# Altium PCB PCBtodojunto.PcbDoc (part 1 of 2)
Units mm, origin at the board's own origin, x right, y up, seen from the top; angles counter-clockwise.
Board outline 200 x 200 mm, 2 copper layers (Top Layer, Bottom Layer); 188 components, 125 nets, 535 pads, 86 vias.
Unrouted connection lines stored in the file: 1.
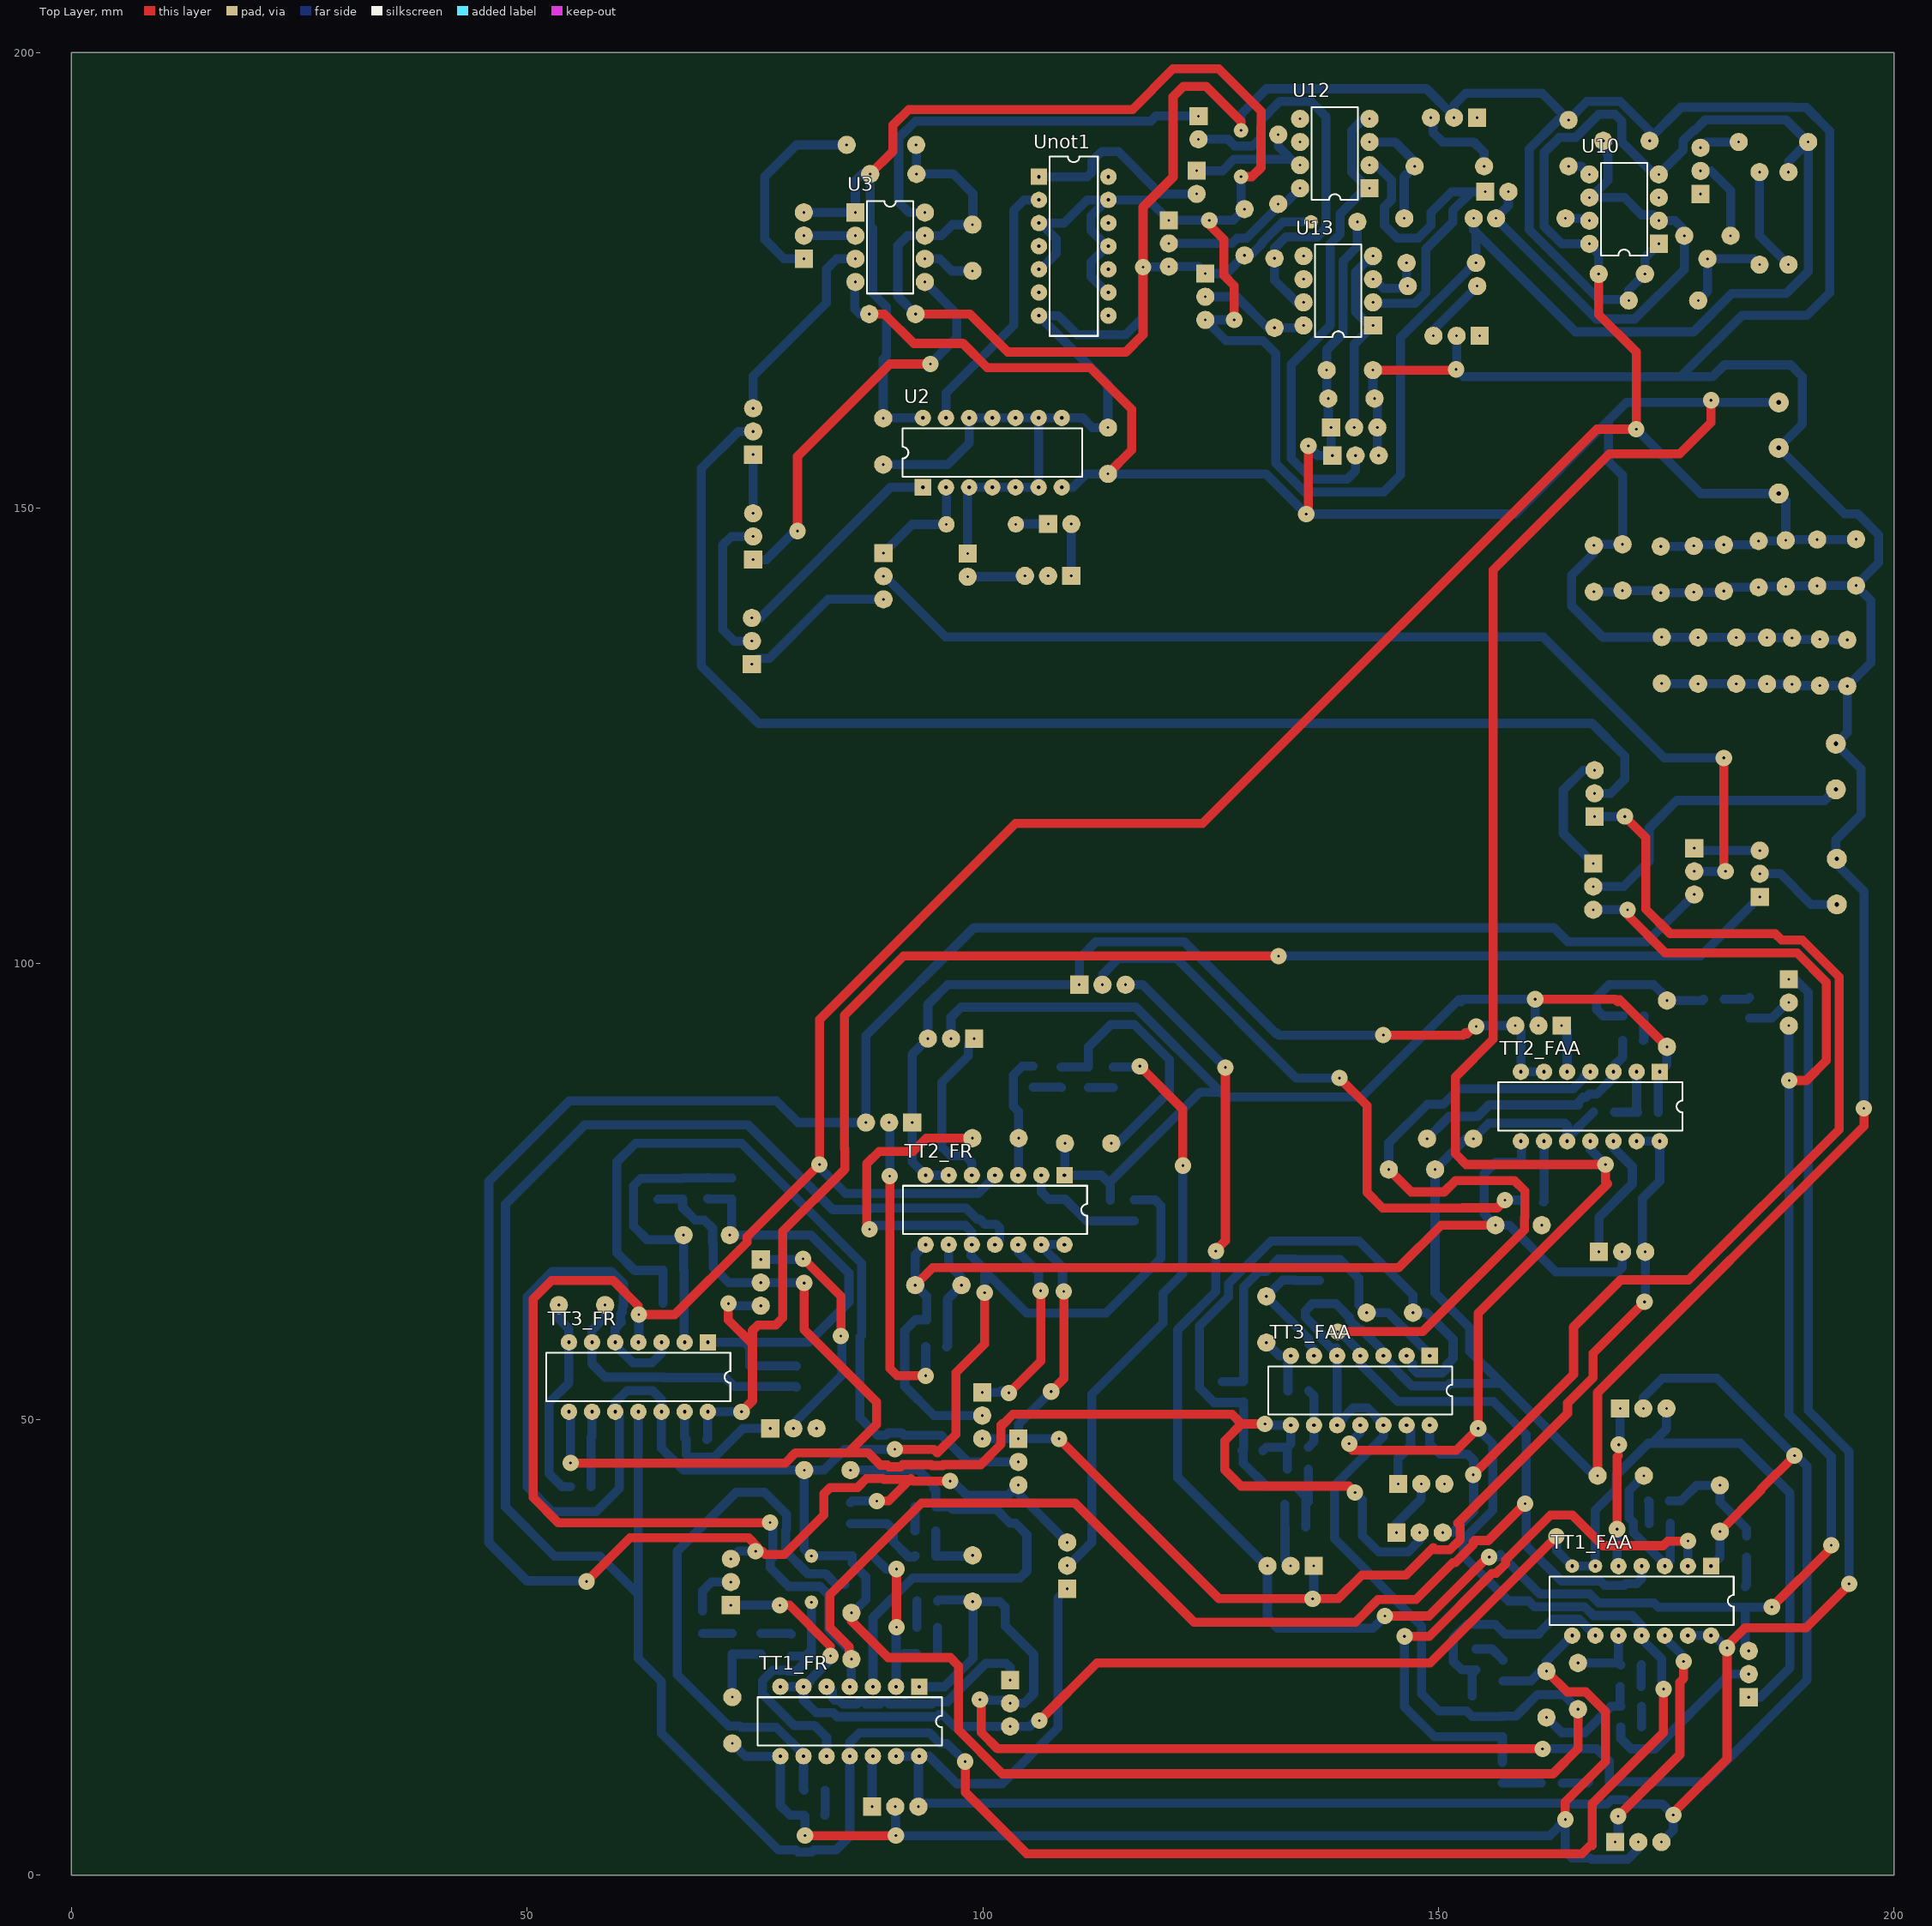
[diagram p0: Top Layer view]
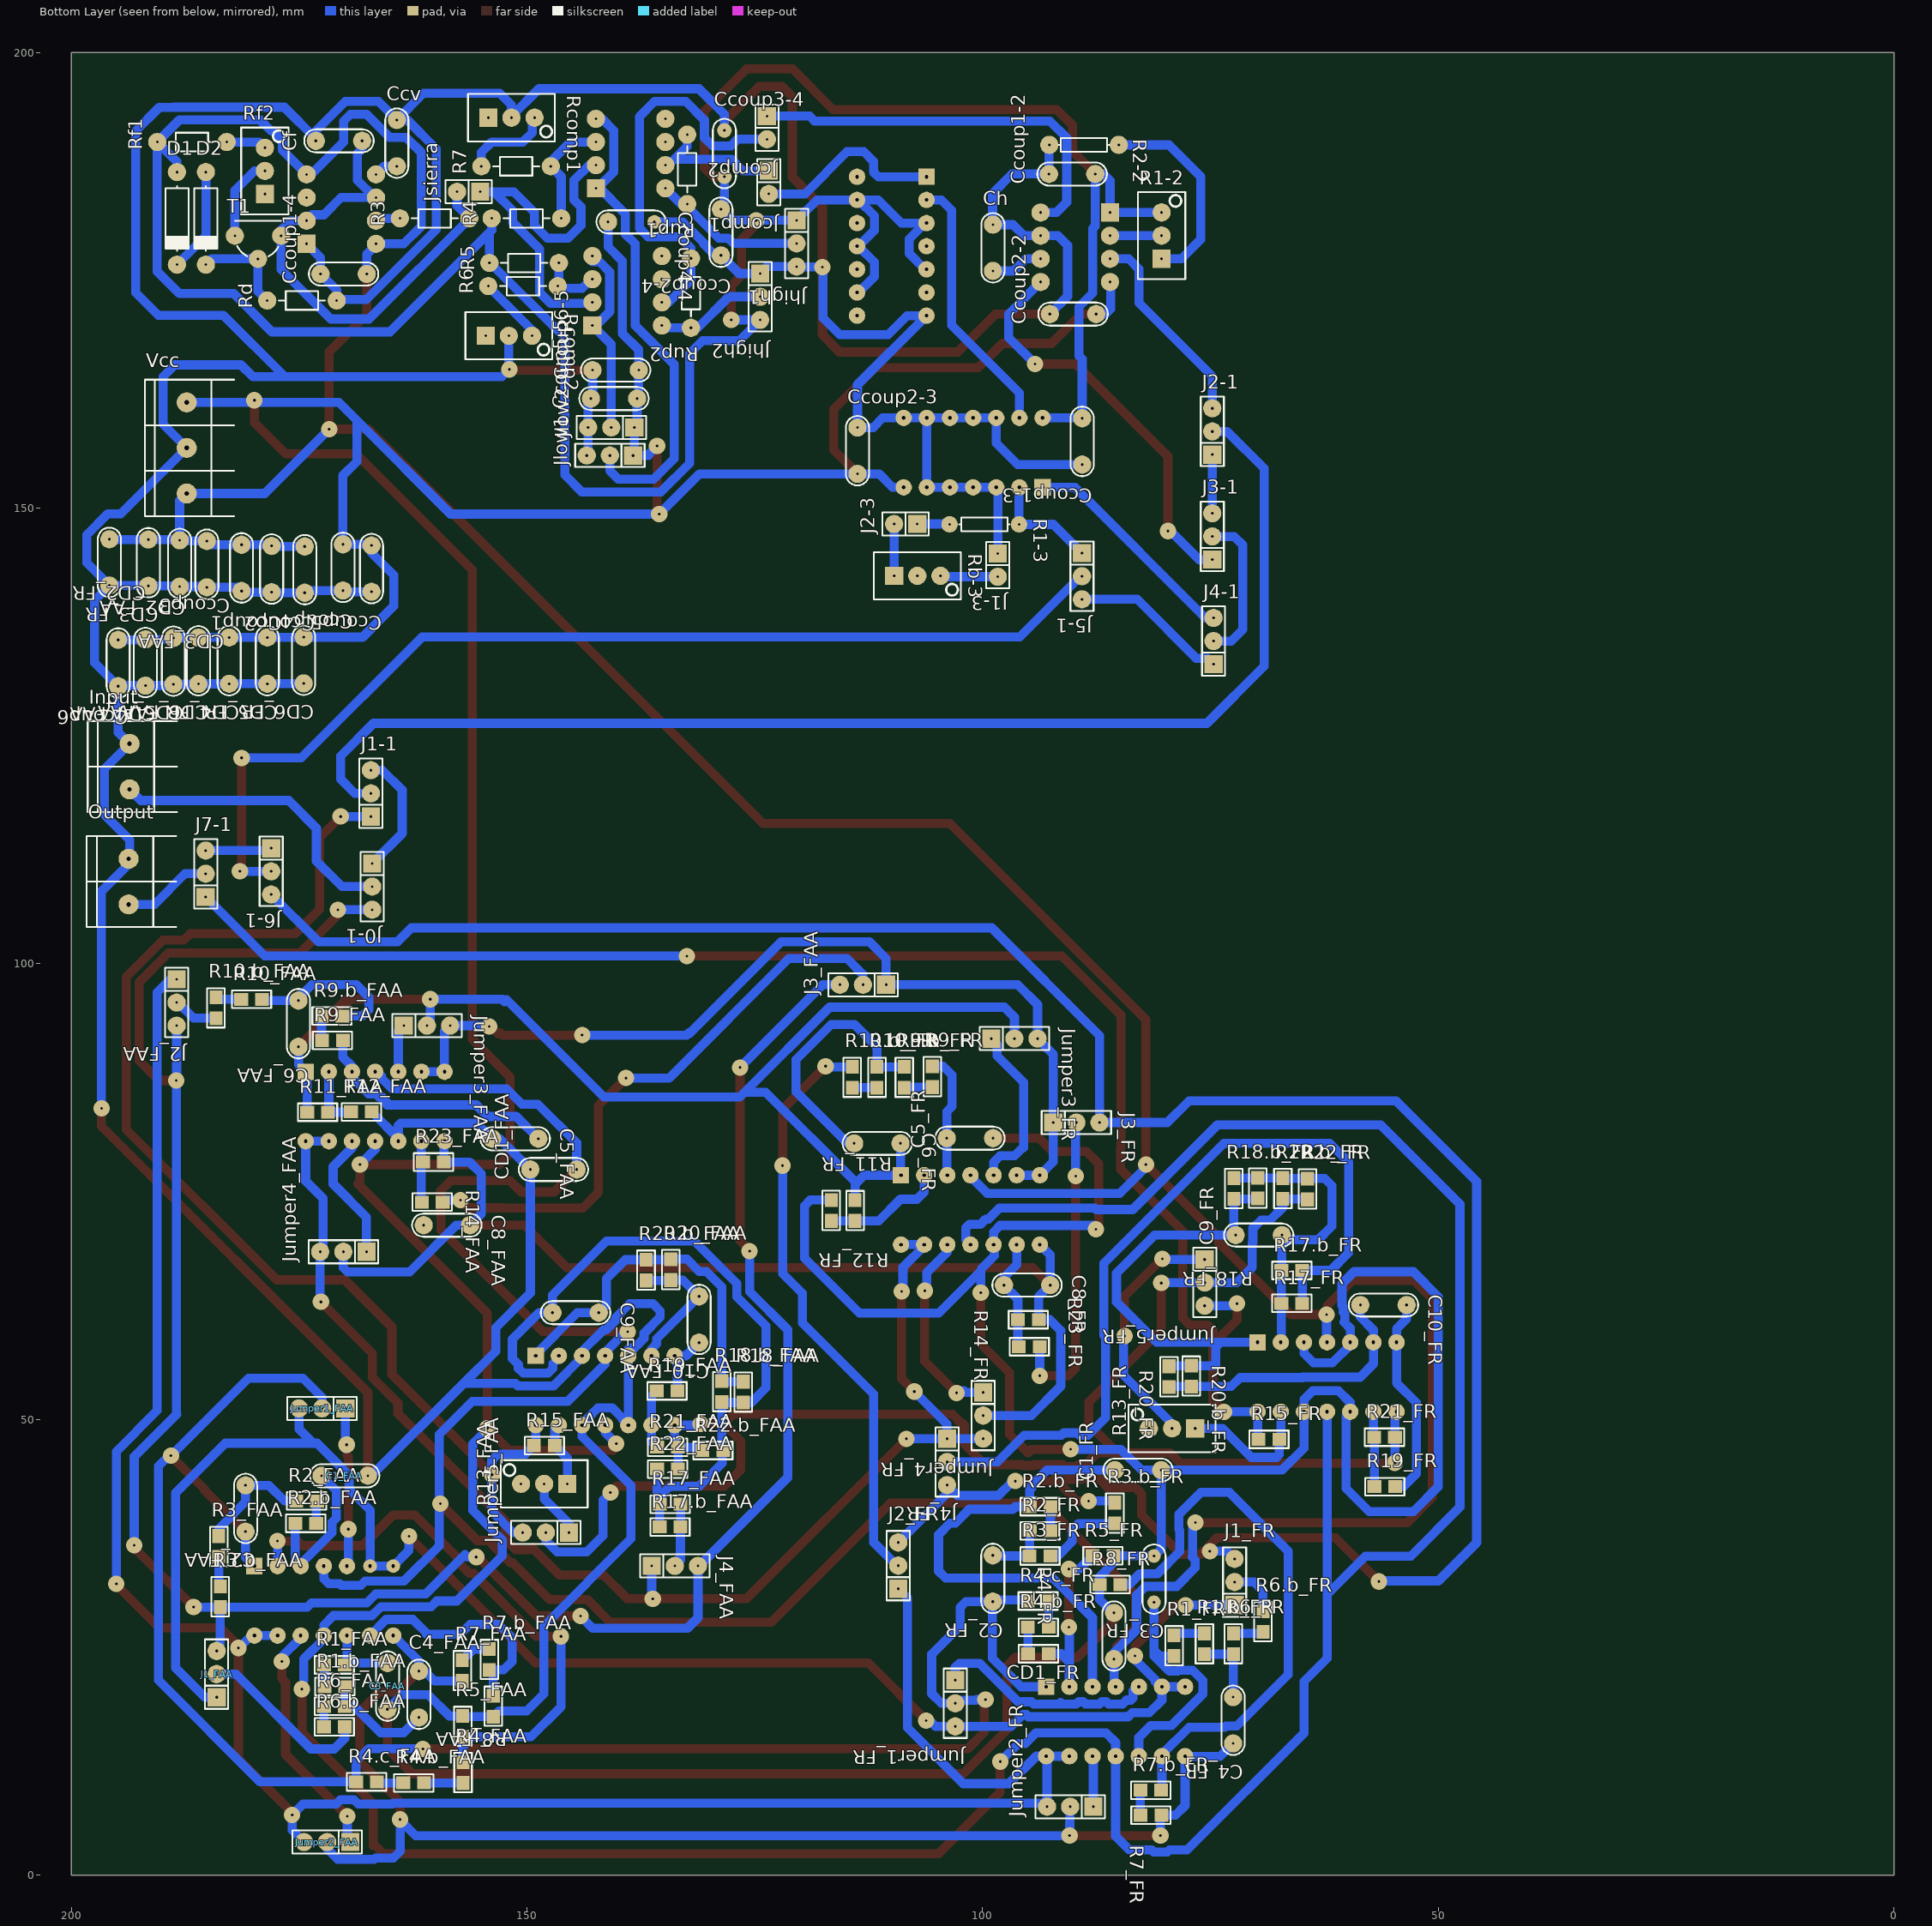
[diagram p1: Bottom Layer view, seen from below]
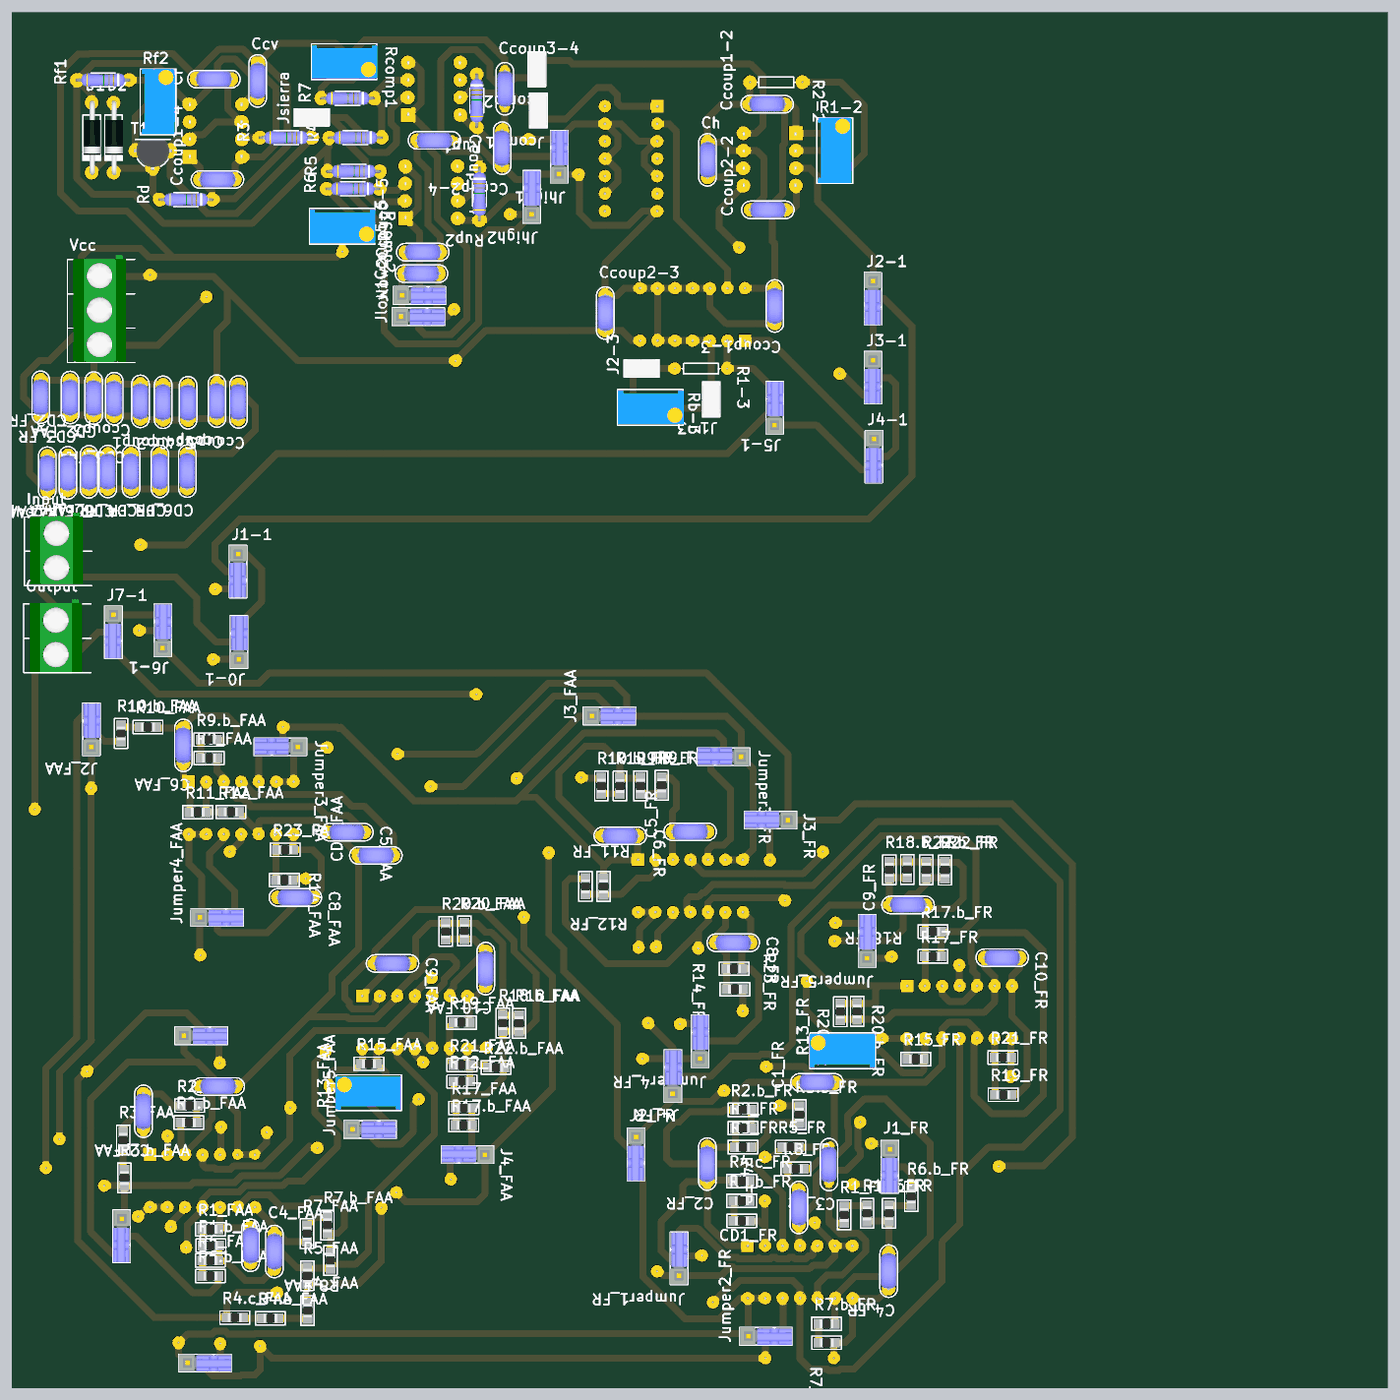
[diagram p3: 3D render of the assembled board from below, using the file's embedded part models]

## Layer stack, top to bottom
Top Solder: solder mask 0.0102, Solder Resist, Dk 3.5
Top Layer: signal copper 0.0356
Dielectric 1: dielectric 0.32, FR-4, Dk 4.8
Bottom Layer: signal copper 0.0356
Bottom Solder: solder mask 0.0102, Solder Resist, Dk 3.5

## Board outline
0,0 200,0 200,200 0,200

## Design rules (kind name [scope] priority, off if disabled: settings)
Clearance [All] p1: gap=0.4 ignorepadtopadclearanceinfootprint=FALSE
PolygonConnect [All] p1: connectstyle=Relief reliefconductorwidth=0.254 reliefentries=4 polygonreliefangle="90 Angle" airgapwidth=0.254
RoutingVias [All] p1: holewidth=0.4 width=2 viastyle="Through Hole" minholewidth=0.3 minwidth=1.9 maxholewidth=0.5 maxwidth=2.1
SolderMaskExpansion [All] p1: expansion=0.102
Width [All] p1: maxlimit=1.1 minlimit=0.9 preferedwidth=1
30 further rules are at their usual default settings.

## Classes and differential pairs
channel class Schematic: FAA FR
component class sampler: Ccoup1 Ccoup2 Ccoup3 Ccoup4 Ccoup5 Ccoup6 Input J0-1 J1-1 J2-1 J3-1 J4-1 J5-1 J6-1 J7-1 Output Unot1 Vcc
component class "SAMPLE AND HOLD": Ccoup1-2 Ccoup2-2 Ch R1-2 R2-2 U3
component class OSCILADOR: Ccoup1-4 Ccoup2-4 Ccoup3-4 Ccoup4-4 Ccoup5-5 Ccoup6-5 Ccv Cf D1 D2 Jcomp1 Jcomp2 Jhigh1 Jhigh2 Jlow1 Jlow2 Jsierra R3 R4 R5 R6 R7 Rcomp1 Rcomp2 Rd Rf1 Rf2 Rup1 Rup2 T1 U10 U12 U13
component class FR: C1_FR C2_FR C3_FR C4_FR C5_FR C6_FR C8_FR C9_FR C10_FR CD1_FR CD2_FR CD3_FR CD4_FR CD5_FR CD6_FR J1_FR J2_FR J3_FR J4_FR Jumper1_FR Jumper2_FR Jumper3_FR Jumper4_FR Jumper5_FR R1.b_FR R1_FR R2.b_FR R2_FR R3.b_FR R3_FR R4.b_FR R4.c_FR R4_FR R5_FR R6.b_FR R6_FR R7.b_FR R7_FR R8_FR R9.b_FR R9_FR R10.b_FR R10_FR R11_FR R12_FR R13_FR R14_FR R15_FR R17.b_FR R17_FR R18.b_FR R18_FR R19_FR R20.b_FR R20_FR R21_FR R22.b_FR R22_FR R23_FR TT1_FR TT2_FR TT3_FR
component class FAA: C1_FAA C2_FAA C3_FAA C4_FAA C5_FAA C6_FAA C8_FAA C9_FAA C10_FAA CD1_FAA CD2_FAA CD3_FAA CD4_FAA CD5_FAA CD6_FAA J1_FAA J2_FAA J3_FAA J4_FAA Jumper1_FAA Jumper2_FAA Jumper3_FAA Jumper4_FAA Jumper5_FAA R1.b_FAA R1_FAA R2.b_FAA R2_FAA R3.b_FAA R3_FAA R4.b_FAA R4.c_FAA R4_FAA R5_FAA R6.b_FAA R6_FAA R7.b_FAA R7_FAA R8_FAA R9.b_FAA R9_FAA R10.b_FAA R10_FAA R11_FAA R12_FAA R13_FAA R14_FAA R15_FAA R17.b_FAA R17_FAA R18.b_FAA R18_FAA R19_FAA R20.b_FAA R20_FAA R21_FAA R22.b_FAA R22_FAA R23_FAA TT1_FAA TT2_FAA TT3_FAA
component class "ANALOG SWITCH": Ccoup1-3 Ccoup2-3 J1-3 J2-3 R1-3 Rb-3 U2

## Components (designator, comment, footprint, x,y, rotation, side; value= is the part's Value field where it differs from the comment)
C1_FAA "1n" CAP200#1 170.01,43.837 r0 bottom (schematic designator C1)
C1_FR "1n" CAP200#1 82.954,44.447 r0 bottom (schematic designator C1)
C2_FAA "1n" CAP200#1 180.894,40.237 r270 bottom (schematic designator C2)
C2_FR "1n" CAP200#1 98.894,32.557 r270 bottom (schematic designator C2)
C3_FAA "1n" CAP200#1 165.32,20.747 r90 bottom (schematic designator C3)
C3_FR "1n" CAP200#2 81.204,32.487 r270 bottom (schematic designator C3)
C4_FAA "1n" CAP200#1 161.86,19.847 r90 bottom (schematic designator C4)
C4_FR "1n" CAP200#1 72.524,16.997 r270 bottom (schematic designator C4)
C5_FAA "1n" CAP200#1 151.3,80.817 r180 bottom (schematic designator C5)
C5_FR "1n" CAP200#1 101.404,80.874 r0 bottom (schematic designator C5)
C6_FAA "1n" CAP200#1 175.084,93.437 r270 bottom (schematic designator C6)
C6_FR "1n" CAP200#1 111.564,80.304 r180 bottom (schematic designator C6)
C8_FAA "7.9n" CAP200#1 158.804,71.327 r180 bottom (schematic designator C8)
C8_FR "7.9n" CAP200#1 95.134,64.744 r180 bottom (schematic designator C8)
C9_FAA "10n" CAP200#1 144.674,61.727 r180 bottom (schematic designator C9)
C9_FR "10n" CAP200#1 69.714,70.237 r0 bottom (schematic designator C9)
C10_FAA "10n" CAP200#1 131.124,60.977 r270 bottom (schematic designator C10)
C10_FR "10n" CAP200#1 56.024,62.567 r180 bottom (schematic designator C10)
Ccoup1 "CAP" CAP200#1 178.03,143.32 r270 bottom
Ccoup1-2 "CAP" CAP200#1 90.19,186.676 r0 bottom
Ccoup1-3 "CAP" CAP200#1 89.084,157.33 r270 bottom
Ccoup1-4 "CAP" CAP200#1 170.13,175.709 r0 bottom
Ccoup2 "CAP" CAP200#1 174.4,143.26 r270 bottom
Ccoup2-2 "CAP" CAP200#1 90.09,171.306 r0 bottom
Ccoup2-3 "CAP" CAP200#1 113.744,156.31 r90 bottom
Ccoup2-4 "CAP" CAP200#1 128.728,180.281 r270 bottom
Ccoup3 "CAP" CAP200#1 181.33,143.45 r270 bottom
Ccoup3-4 "CAP" CAP200#3 128.347,188.917 r90 bottom
Ccoup4 "CAP" CAP200#1 170.21,143.5 r270 bottom
Ccoup4-4 "CAP" CAP200#4 138.57,181.424 r180 bottom
Ccoup5 "CAP" CAP200#1 167.07,143.37 r270 bottom
Ccoup5-5 "CAP" CAP200#1 140.46,162.034 r0 bottom
Ccoup6 "CAP" CAP200#1 194.87,133.01 r270 bottom
Ccoup6-5 "CAP" CAP200#1 140.28,165.154 r0 bottom
Ccv "CAP" CAP200#1 164.288,190.06 r90 bottom
CD1_FAA "100n" CAP200#1 147.1,77.437 r0 bottom (schematic designator CD1)
CD1_FR "100n" CAP200#1 85.594,26.247 r90 bottom (schematic designator CD1)
CD2_FAA "100n" CAP200#1 188.12,143.94 r270 bottom (schematic designator CD2)
CD2_FR "100n" CAP200#1 195.83,144.054 r270 bottom (schematic designator CD2)
CD3_FAA "100n" CAP200#1 185.14,143.86 r270 bottom (schematic designator CD3)
CD3_FR "100n" CAP200#1 191.562,144.022 r270 bottom (schematic designator CD3)
CD4_FAA "100n" CAP200#1 191.87,133.07 r270 bottom (schematic designator CD4)
CD4_FR "100n" CAP200#1 182.69,133.274 r270 bottom (schematic designator CD4)
CD5_FAA "100n" CAP200#1 188.81,133.22 r270 bottom (schematic designator CD5)
CD5_FR "100n" CAP200#1 178.5,133.274 r270 bottom (schematic designator CD5)
CD6_FAA "100n" CAP200#1 186.064,133.26 r270 bottom (schematic designator CD6)
CD6_FR "100n" CAP200#1 174.51,133.314 r270 bottom (schematic designator CD6)
Cf "CAP" CAP200#1 170.638,190.314 r0 bottom
Ch "CAP" CAP200#1 98.88,178.576 r90 bottom
D1 "DIODO SCHOTTKY" DO41 188.418,181.805 r270 bottom
D2 "DIODO SCHOTTKY" DO41 185.243,181.805 r270 bottom
Input "BORNERA 2" BORNERA2 193.62,121.65 r180 bottom
J0-1 "JUMPER" JUMPER3 167,108.48 r270 bottom
J1-1 "JUMPER" JUMPER3 167.14,118.71 r90 bottom
J1-3 "JUMPER" JUMPER2 98.344,143.75 r270 bottom
J1_FAA "JUMPER" JUMPER3 184.06,22.067 r90 bottom (schematic designator J1)
J1_FR "JUMPER" JUMPER3 72.364,32.167 r90 bottom (schematic designator J1)
J2-1 "JUMPER" JUMPER3 74.81,158.42 r90 bottom
J2-3 "JUMPER" JUMPER2 108.454,148.27 r0 bottom
J2_FAA "JUMPER" JUMPER3 188.454,95.757 r270 bottom (schematic designator J2)
J2_FR "JUMPER" JUMPER3 109.27,33.97 r90 bottom (schematic designator J2)
J3-1 "JUMPER" JUMPER3 74.81,146.9 r90 bottom
J3_FAA "JUMPER" JUMPER3 113.14,97.71 r0 bottom (schematic designator J3)
J3_FR "JUMPER" JUMPER3 89.724,82.587 r180 bottom (schematic designator J3)
J4-1 "JUMPER" JUMPER3 74.67,135.42 r90 bottom
J4_FAA "JUMPER" JUMPER3 133.784,33.937 r180 bottom (schematic designator J4)
J4_FR "JUMPER" JUMPER3 103.914,45.347 r270 bottom (schematic designator J4)
J5-1 "JUMPER" JUMPER3 89.11,142.54 r270 bottom
J6-1 "JUMPER" JUMPER3 178.08,110.15 r270 bottom
J7-1 "JUMPER" JUMPER3 185.27,109.89 r90 bottom
Jcomp1 "JUMPER" JUMPER2 123.47,185.76 r270 bottom
Jcomp2 "JUMPER" JUMPER2 123.68,191.754 r270 bottom
Jhigh1 "JUMPER" JUMPER3 120.43,179.054 r270 bottom
Jhigh2 "JUMPER" JUMPER3 124.43,173.204 r270 bottom
Jlow1 "JUMPER" JUMPER3 140.91,155.784 r0 bottom
Jlow2 "JUMPER" JUMPER3 140.76,158.864 r0 bottom
Jsierra "JUMPER" JUMPER2 156.414,184.726 r0 bottom
Jumper1_FAA "JUMPER" JUMPER3 172.49,51.217 r0 bottom (schematic designator Jumper1)
Jumper1_FR "JUMPER" JUMPER3 103.01,18.86 r270 bottom (schematic designator Jumper1)
Jumper2_FAA "JUMPER" JUMPER3 171.94,3.637 r0 bottom (schematic designator Jumper2)
Jumper2_FR "JUMPER" JUMPER3 90.404,7.517 r0 bottom (schematic designator Jumper2)
Jumper3_FAA "JUMPER" JUMPER3 160.99,93.227 r180 bottom (schematic designator Jumper3)
Jumper3_FR "JUMPER" JUMPER3 96.524,91.797 r180 bottom (schematic designator Jumper3)
Jumper4_FAA "JUMPER" JUMPER3 170.16,68.407 r0 bottom (schematic designator Jumper4)
Jumper4_FR "JUMPER" JUMPER3 99.944,50.437 r270 bottom (schematic designator Jumper4)
Jumper5_FAA "JUMPER" JUMPER3 147.944,37.597 r0 bottom (schematic designator Jumper5)
Jumper5_FR "JUMPER" JUMPER3 75.644,65.027 r270 bottom (schematic designator Jumper5)
Output "BORNERA 2" BORNERA2 193.72,109.03 r180 bottom
R1-2 "PRESET" "PRESET V" 80.37,179.916 r90 bottom
R1-3 "Res1" AXIAL-0.3#1 99.824,148.23 r180 bottom
R1.b_FAA "39k" 0805 171.084,20.687 r0 bottom (schematic designator R1.b)
R1.b_FR "39k" 0805 75.674,25.397 r90 bottom (schematic designator R1.b)
R1_FAA "5.1k" 0805 171.154,23.077 r180 bottom (schematic designator R1)
R1_FR "5.1k" 0805 79.004,25.177 r270 bottom (schematic designator R1)
R2-2 "Res1" AXIAL-0.3#2 88.88,189.866 r180 bottom value=1K
R2.b_FAA "2.2k" 0805 174.29,38.607 r0 bottom (schematic designator R2.b)
R2.b_FR "2.2k" 0805 93.704,40.437 r0 bottom (schematic designator R2.b)
R2_FAA "33k" 0805 174.19,41.057 r180 bottom (schematic designator R2)
R2_FR "33k" 0805 93.704,37.787 r180 bottom (schematic designator R2)
R3 "RES" RES300 156.331,181.805 r0 bottom
R3.b_FAA "33k" 0805 183.664,30.547 r90 bottom (schematic designator R3.b)
R3.b_FR "33k" 0805 85.504,39.737 r270 bottom (schematic designator R3.b)
R3_FAA "2.2k" 0805 183.834,36.067 r90 bottom (schematic designator R3)
R3_FR "2.2k" 0805 93.717,35.027 r0 bottom (schematic designator R3)
R4 "RES" RES300 146.254,181.805 r0 bottom
R4.b_FAA "6.8k" 0805 162.44,10.127 r0 bottom (schematic designator R4.b)
R4.b_FR "6.8k" 0805 93.904,27.207 r180 bottom (schematic designator R4.b)
R4.c_FAA "1k" 0805 167.62,10.237 r0 bottom (schematic designator R4.c)
R4.c_FR "1k" 0805 93.917,30.087 r0 bottom (schematic designator R4.c)
R4_FAA "8.2k" 0805 157.02,11.257 r90 bottom (schematic designator R4)
R4_FR "8.2k" 0805 93.887,24.297 r180 bottom (schematic designator R4)
R5 "RES" RES300 146.51,176.914 r0 bottom
R5_FAA "10k" 0805 157.06,16.327 r270 bottom (schematic designator R5)
R5_FR "10k" 0805 86.804,35.047 r0 bottom (schematic designator R5)
R6 "RES" RES300 146.64,174.374 r0 bottom
R6.b_FAA "39k" 0805 171.154,16.277 r0 bottom (schematic designator R6.b)
R6.b_FR "39k" 0805 69.244,27.834 r270 bottom (schematic designator R6.b)
R6_FAA "5.1k" 0805 171.154,18.527 r180 bottom (schematic designator R6)
R6_FR "5.1k" 0805 72.484,25.397 r270 bottom (schematic designator R6)
R7 "RES" RES300 147.397,187.52 r0 bottom
R7.b_FAA "10k" 0805 154.14,23.667 r270 bottom (schematic designator R7.b)
R7.b_FR "10k" 0805 81.557,9.327 r180 bottom (schematic designator R7.b)
R7_FAA "1.5k" 0805 157.1,22.447 r270 bottom (schematic designator R7)
R7_FR "1.5k" 0805 81.537,6.587 r180 bottom (schematic designator R7)
R8_FAA "10k" 0805 153.71,18.537 r90 bottom (schematic designator R8)
R8_FR "10k" 0805 86.03,31.88 r180 bottom (schematic designator R8)
R9.b_FAA "47k" 0805 171.404,94.277 r0 bottom (schematic designator R9.b)
R9.b_FR "47k" 0805 108.614,87.554 r270 bottom (schematic designator R9.b)
R9_FAA "15k" 0805 171.354,91.597 r180 bottom (schematic designator R9)
R9_FR "15k" 0805 105.534,87.624 r90 bottom (schematic designator R9)
R10.b_FAA "47k" 0805 184.134,95.177 r90 bottom (schematic designator R10.b)
R10.b_FR "47k" 0805 114.314,87.554 r270 bottom (schematic designator R10.b)
R10_FAA "15k" 0805 180.237,96.107 r180 bottom (schematic designator R10)
R10_FR "15k" 0805 111.604,87.554 r90 bottom (schematic designator R10)
R11_FAA "5.1k" 0805 172.99,83.717 r180 bottom (schematic designator R11)
R11_FR "5.1k" 0805 114.004,72.931 r270 bottom (schematic designator R11)
R12_FAA "10k" 0805 168.18,83.757 r0 bottom (schematic designator R12)
R12_FR "10k" 0805 116.615,72.941 r270 bottom (schematic designator R12)
R13_FAA "15k" "PRESET V" 148.124,42.937 r0 bottom (schematic designator R13)
R13_FR "15k" "PRESET V" 79.224,49.027 r0 bottom (schematic designator R13)
R14_FAA "10k" 0805 160.4,73.85 r0 bottom (schematic designator R14)
R14_FR "10k" 0805 94.891,57.984 r0 bottom (schematic designator R14)
R15_FAA "1.2k" 0805 148.104,47.137 r0 bottom (schematic designator R15)
R15_FR "1.2k" 0805 68.594,47.827 r0 bottom (schematic designator R15)
R17.b_FAA "6.8k" 0805 134.314,38.217 r0 bottom (schematic designator R17.b)
R17.b_FR "6.8k" 0805 66.084,66.357 r0 bottom (schematic designator R17.b)
R17_FAA "5.6k" 0805 134.304,40.707 r0 bottom (schematic designator R17)
R17_FR "5.6k" 0805 66.084,62.747 r0 bottom (schematic designator R17)
R18.b_FAA "47k" 0805 128.634,53.067 r90 bottom (schematic designator R18.b)
R18.b_FR "47k" 0805 72.444,75.347 r270 bottom (schematic designator R18.b)
R18_FAA "47k" 0805 126.274,53.017 r90 bottom (schematic designator R18)
R18_FR "47k" 0805 69.814,75.394 r270 bottom (schematic designator R18)
R19_FAA "10k" 0805 134.644,53.137 r0 bottom (schematic designator R19)
R19_FR "10k" 0805 55.884,42.637 r0 bottom (schematic designator R19)
R20.b_FAA "6.8k" 0805 136.94,66.39 r270 bottom (schematic designator R20.b)
R20.b_FR "6.8k" 0805 77.114,54.764 r270 bottom (schematic designator R20.b)
R20_FAA "5.6k" 0805 134.23,66.45 r270 bottom (schematic designator R20)
R20_FR "5.6k" 0805 79.554,54.694 r270 bottom (schematic designator R20)
R21_FAA "10k" 0805 134.584,46.967 r180 bottom (schematic designator R21)
R21_FR "10k" 0805 55.914,48.057 r180 bottom (schematic designator R21)
R22.b_FAA "6.8k" 0805 129.614,46.597 r0 bottom (schematic designator R22.b)
R22.b_FR "6.8k" 0805 67.064,75.347 r270 bottom (schematic designator R22.b)
R22_FAA "5.6k" 0805 134.584,44.567 r180 bottom (schematic designator R22)
R22_FR "5.6k" 0805 64.364,75.294 r270 bottom (schematic designator R22)
R23_FAA "10k" 0805 160.274,78.257 r180 bottom (schematic designator R23)
R23_FR "10k" 0805 94.994,60.954 r180 bottom (schematic designator R23)
Rb-3 "PRESET" "PRESET V" 107.174,142.58 r180 bottom
Rcomp1 "PRESET" "PRESET V" 151.715,192.854 r180 bottom
Rcomp2 "PRESET" "PRESET V" 152,168.924 r180 bottom
Rd "RES" RES300 170.892,172.788 r0 bottom
Rf1 "RES" RES300 182.957,190.187 r0 bottom
Rf2 "PRESET" "PRESET V" 178.766,187.012 r90 bottom
Rup1 "RES" RES300 132.43,190.994 r270 bottom
Rup2 "RES" RES300 132.02,177.414 r270 bottom
T1 "TRANSISTOR PNP" TO92 179.528,178.63 r180 bottom
TT1_FAA "TL084ACN" DIP14#1 172.304,30.106 r180 top (schematic designator TT1)
TT1_FR "TL084ACN" DIP14#2 85.414,16.867 r180 top (schematic designator TT1)
TT2_FAA "TL084ACN" DIP14#2 166.674,84.35 r180 top (schematic designator TT2)
TT2_FR "TL084ACN" DIP14#2 101.352,73.001 r180 top (schematic designator TT2)
TT3_FAA "TL084ACN" DIP14#2 141.434,53.186 r180 top (schematic designator TT3)
TT3_FR "TL084ACN" DIP14#2 62.212,54.66 r180 top (schematic designator TT3)
U2 "TLC4066IN" N014 101.054,156.1 r0 top
U3 "LF398" DIP8 86.03,182.446 r0 top
U10 "LM555" DIP8 174.194,179.011 r180 top
U12 "IC_DIP8" DIP8 142.444,185.107 r180 top
U13 "IC_DIP8" DIP8 142.83,170.054 r180 top
Unot1 "SN7404N" N014 109.98,178.75 r270 top
Vcc "BORNERA 3" BORNERA3 187.35,156.61 r180 bottom

## Footprints (in the part's own frame and the unit in brackets; to place one, negate y for a bottom-side part, rotate by r counter-clockwise, add the part's x,y. Pads: shape width x height; smd on the part's side, far side on the other; paste and mask are expansions set on the pad)
0805 [mil] "Pasivo 0805"
  rect 60x56 smd: 1(-45,0) 2(45,0)
  silkscreen extent -85,-38 85,38, body extent -40,-24 39,25, height 15
AXIAL-0.3#1 [mm] "Axial Device, Thru-Hole; 2 Leads; 0.3 in Pin Spacing"
  round 1.8 hole 0.3: 1(-3.81,0) 2(3.81,0)
  silkscreen extent -2.77,-0.76 2.77,0.76
AXIAL-0.3#2 [mm] "Axial Device, Thru-Hole; 2 Leads; 0.3 in Pin Spacing"
  round 2 hole 0.3: 1(-3.81,0) 2(3.81,0)
  silkscreen extent -2.77,-0.76 2.77,0.76
BORNERA2 [mm] "Bornera con Tornillos 5mm separación"
  round 2.2 / inner round 3.75 / far side round 2.2 hole 0.5 unplated: 1(0,2.5) 2(0,-2.5)
  silkscreen extent -4.6,-5 5.2,5, body extent -3.76,-4.89 3.94,5.61, height 10
BORNERA3 [mm] "Bornera con Tornillos 5mm separación"
  round 2.2 / inner round 3.75 / far side round 2.2 hole 0.5 unplated: 1(0,5) 2(0,0) 3(0,-5)
  silkscreen extent -4.6,-7.5 5.2,7.5, body extent -3.76,-7.39 3.94,8.11, height 10.05
CAP200#1 [mm]
  round 2 hole 0.3: 1(-2.54,0) 2(2.54,0)
  silkscreen extent -3.81,-1.27 3.81,1.27, body extent -2.79,-1.17 2.79,1.12, height 6.24
CAP200#2 [mm]
  round 1.5 hole 0.3: 1(-2.54,0) 2(2.54,0)
  silkscreen extent -3.81,-1.27 3.81,1.27, body extent -2.79,-1.17 2.79,1.12, height 6.24
CAP200#3 [mm]
  round 1.6 hole 0.3: 1(-2.54,0) 2(2.54,0)
  silkscreen extent -3.81,-1.27 3.81,1.27, body extent -2.79,-1.17 2.79,1.12, height 6.24
CAP200#4 [mm]
  round 2 hole 0.3: 1(-2.54,0)
  round 1.5 hole 0.3: 2(2.54,0)
  silkscreen extent -3.81,-1.27 3.81,1.27, body extent -2.79,-1.17 2.79,1.12, height 6.24
DIP8 [mm]
  rect 2x2 hole 0.3: 1(0,0)
  round 2 hole 0.3: 2(0,-2.54) 3(0,-5.08) 4(0,-7.62) 5(7.62,-7.62) 6(7.62,-5.08) 7(7.62,-2.54) 8(7.62,0)
  silkscreen extent 1.27,-8.89 6.35,1.27, body extent -0.06,-9.21 7.7,1.59, height 4.5
DIP14#1 [mm] "DIP; 14 Leads; Row Spacing 7.62 mm; Pitch 2.54 mm"
  rect 1.8x1.8 hole 0.4: 1(-7.62,-3.81)
  round 1.8 hole 0.4: 2(-5.08,-3.81) 3(-2.54,-3.81) 4(0,-3.81) 5(2.54,-3.81) 8(7.62,3.81) 9(5.08,3.81) 10(2.54,3.81) 11(0,3.81) 12(-2.54,3.81) 13(-5.08,3.81) 14(-7.62,3.81)
  round 1.5 hole 0.4: 6(5.08,-3.81) 7(7.62,-3.81)
  silkscreen extent -10.1,-2.65 10.1,2.65
DIP14#2 [mm] "DIP; 14 Leads; Row Spacing 7.62 mm; Pitch 2.54 mm"
  rect 1.8x1.8 hole 0.4: 1(-7.62,-3.81)
  round 1.8 hole 0.4: 2(-5.08,-3.81) 3(-2.54,-3.81) 4(0,-3.81) 5(2.54,-3.81) 6(5.08,-3.81) 7(7.62,-3.81) 8(7.62,3.81) 9(5.08,3.81) 10(2.54,3.81) 11(0,3.81) 12(-2.54,3.81) 13(-5.08,3.81) 14(-7.62,3.81)
  silkscreen extent -10.1,-2.65 10.1,2.65
DO41 [mm]
  round 2 hole 0.3: 1(-5.08,0) 2(5.08,0)
  silkscreen extent -3.56,-1.27 3.56,1.27, body extent -5.46,-1.19 5.46,1.37, height 2.03
JUMPER2 [mm]
  rect 2x2 hole 0.3: 1(-1.27,0)
  round 2 hole 0.3: 2(1.27,0)
  silkscreen extent -2.54,-1.27 2.54,1.27, body extent -2.46,-1.27 2.54,1.27, height 9.5
JUMPER3 [mm]
  rect 2x2 hole 0.3: 1(-2.54,0)
  round 2 hole 0.3: 2(0,0) 3(2.54,0)
  silkscreen extent -3.81,-1.27 3.81,1.27, body extent -3.81,-1.3 3.81,1.27, height 16.15
N014 [mm] "DIP; 14 Leads; Row Spacing 7.62 mm; Pitch 2.54 mm"
  rect 1.8x1.8 hole 0.4: 1(-7.62,-3.81)
  round 1.8 hole 0.4: 2(-5.08,-3.81) 3(-2.54,-3.81) 4(0,-3.81) 5(2.54,-3.81) 6(5.08,-3.81) 7(7.62,-3.81) 8(7.62,3.81) 9(5.08,3.81) 10(2.54,3.81) 11(0,3.81) 12(-2.54,3.81) 13(-5.08,3.81) 14(-7.62,3.81)
  silkscreen extent -9.85,-2.65 9.85,2.65
"PRESET V" [mm]
  rect 2x2 hole 0.3: 1(-2.54,0)
  round 2 hole 0.3: 2(0,0) 3(2.54,0)
  silkscreen extent -4.76,-2.6 4.76,2.6, body extent -4.7,-2.42 4.83,2.42, height 11.55
RES300 [mm]
  round 2 hole 0.3: 1(0,0) 2(7.62,0)
  silkscreen extent 1.27,-1.02 6.35,1.02, body extent -0.25,-0.97 7.87,0.97, height 2.01
TO92 [mm]
  round 2 hole 0.3: 1(0,-1.27) 2(2.54,1.27) 3(-2.54,1.27)
  silkscreen extent -2.54,-1 2.54,2.92, body extent -2.79,-1.55 2.79,2.79, height 8

## Part data
C1_FAA C1_FR C2_FAA C2_FR C3_FAA C3_FR C4_FAA C4_FR C5_FAA C5_FR C6_FAA C6_FR C8_FAA C8_FR C9_FAA C9_FR C10_FAA C10_FR CD1_FAA CD1_FR CD2_FAA CD2_FR CD3_FAA CD3_FR CD4_FAA CD4_FR CD5_FAA CD5_FR CD6_FAA CD6_FR: library part CAP
J0-1 J1-1 J1_FAA J1_FR J2-1 J2_FAA J2_FR J3-1 J3_FAA J3_FR J4-1 J4_FAA J4_FR J5-1 J6-1 J7-1 Jhigh1 Jhigh2 Jlow1 Jlow2 Jumper1_FAA Jumper1_FR Jumper2_FAA Jumper2_FR Jumper3_FAA Jumper3_FR Jumper4_FAA Jumper4_FR Jumper5_FAA Jumper5_FR: library part JUMPER3
R1-3 R2-2: "Resistor", LatestRevisionDate=17-Jul-2002, LatestRevisionNote="Re-released for DXP Platform.", PackageDescription="Axial Device, Thru-Hole; 2 Leads; 0.3 in Pin Spacing", PackageReference=AXIAL-0.3, Published=8-Jun-2000, Publisher="Altium Limited"
R1.b_FAA R1.b_FR R1_FAA R1_FR R2.b_FAA R2.b_FR R2_FAA R2_FR R3.b_FAA R3.b_FR R3_FAA R3_FR R4.b_FAA R4.b_FR R4.c_FAA R4.c_FR R4_FAA R4_FR R5_FAA R5_FR R6.b_FAA R6.b_FR R6_FAA R6_FR R7.b_FAA R7.b_FR R7_FAA R7_FR R8_FAA R8_FR R9.b_FAA R9.b_FR R9_FAA R9_FR R10.b_FAA R10.b_FR R10_FAA R10_FR R11_FAA R11_FR R12_FAA R12_FR R14_FAA R14_FR R15_FAA R15_FR R17.b_FAA R17.b_FR R17_FAA R17_FR R18.b_FAA R18.b_FR R18_FAA R18_FR R19_FAA R19_FR R20.b_FAA R20.b_FR R20_FAA R20_FR R21_FAA R21_FR R22.b_FAA R22.b_FR R22_FAA R22_FR R23_FAA R23_FR: library part RES
R13_FAA R13_FR: library part PRESET
TT1_FAA TT1_FR TT2_FAA TT2_FR TT3_FAA TT3_FR: "General-Purpose J-FET Quad Operational Amplifier", ComponentLink1Description="Manufacturer Link", ComponentLink1URL=http://www.st.com/, ComponentLink2Description=Datasheet, ComponentLink2URL=http://www.st.com/stonline/products/literature/ds/2301/tl084.pdf, DatasheetVersion=Jan-1999, LatestRevisionDate=06-Jun-2005, LatestRevisionNote="Stylized 3D Model Added.", PackageDescription="DIP; 14 Leads; Row Spacing 7.62 mm; Pitch 2.54 mm", PackageReference=DIP14, PackageVersion=Jan-1997, Published=24-Aug-2001, Publisher="Altium Limited"
U2: "Quadruple Bilateral Analog Switch", ComponentLink1Description="Manufacturer Link", ComponentLink1URL=http://www.ti.com/, DatasheetVersion=Jan-1986, LatestRevisionDate=04-Mar-2005, LatestRevisionNote="Stylized 3D Model Added.", PackageDescription="DIP; 14 Leads; Row Spacing 7.62 mm; Pitch 2.54 mm", PackageReference=N014, PackageVersion=Oct-1995, Published=8-Jun-2000, Publisher="Altium Limited"
U3: library part LM555, "Sample and Hold Amplifier"
U10: "Timer"
Unot1: "Hex Inverter", ComponentLink1Description="Manufacturer Link", ComponentLink1URL=http://www.ti.com/, ComponentLink2Description=Datasheet, ComponentLink2URL=http://www-s.ti.com/sc/ds/sn5404.pdf, ComponentLink3Description="Packaging Specification", ComponentLink3URL=http://focus.ti.com/lit/ml/mpdi002c/mpdi002c.pdf, DatasheetVersion=Mar-1988, LatestRevisionDate=04-Mar-2005, LatestRevisionNote="Stylized 3D Model Added.", PackageDescription="DIP; 14 Leads; Row Spacing 7.62 mm; Pitch 2.54 mm", PackageReference=N014, PackageVersion=Oct-1995, Published=8-Jun-2000, Publisher="Altium Limited"

## Via types
v1: diameter 1.8, hole 0.3, Top Layer to Bottom Layer, 86 vias

## Nets (pads, with @x,y where several pads share a name; then routed paths per layer and width w, separated by ;. In a path a pad name is that pad's centre, name@x,y a point inside that pad or via, vN(x,y) a via of type N, cw(c..) or ccw(c..) an arc to the next point about the centre after c; other vN are vias at no path point)
Clk1: Jcomp2.1 U3.8 | length 44.3
  Bottom Layer w1: U3.8@93.65,182.446 91.91,182.446 90.78,183.576 90.78,190.643 92.627,192.49 118.466,192.49 119,193.024 Jcomp2.1@123.68,193.024
Clk2: U2.13 Unot1.2 | length 29.1
  Bottom Layer w1: U2.13@95.974,159.91 95.974,162.644 103.4,170.07 103.4,182.69 104.54,183.83 Unot1.2@106.17,183.83
comp: Jsierra.1 U12.2 U13.2 | length 42.4
  Bottom Layer w1: U12.2@142.444,187.647 143.177,187.647 144.854,185.97 144.854,183.844 144.09,183.08 144.09,181.048 145.492,179.646 147.778,179.646 149.175,181.043 149.175,182.44 151.461,184.726 153.642,184.726 ; U13.2@142.83,172.594 142.83,172.474 147.427,172.474 148.63,173.677 148.63,178.424 151.6,181.394 151.6,182.684 153.642,184.726 ; Jsierra.1@155.144,184.726 153.642,184.726
GND: C1_FAA.1 C1_FR.1 C3_FAA.1 C3_FR.1 C5_FAA.1 C5_FR.1 Ccoup1-2.2 Ccoup1-3.2 Ccoup1-4.2 Ccoup1.2 Ccoup2-2.2 Ccoup2-3.2 Ccoup2-4.2 Ccoup2.2 Ccoup3-4.2 Ccoup3.2 Ccoup4-4.2 Ccoup4.2 Ccoup5-5.2 Ccoup5.2 Ccoup6-5.2 Ccoup6.2 Ccv.2 CD1_FAA.2 CD1_FR.2 CD2_FAA.2 CD2_FR.2 CD3_FAA.2 CD3_FR.2 CD4_FAA.2 CD4_FR.2 CD5_FAA.2 CD5_FR.2 CD6_FAA.2 CD6_FR.2 Cf.2 Ch.2 Input.1 J1-3.1 Jhigh1.3 Jhigh2.1 Jlow1.3 Jlow2.3 Output.1 R2-2.1 R5_FAA.1 R5_FR.1 R8_FAA.1 R8_FR.1 R12_FAA.1 R12_FR.1 Rcomp1.2 Rcomp2.2 Rd.1 TT2_FAA.10 TT2_FR.10 TT3_FAA.3 TT3_FAA.5 TT3_FAA.10 TT3_FAA.12 TT3_FR.3 TT3_FR.5 TT3_FR.10 TT3_FR.12 U2.3 U2.4 U2.5 U2.6 U2.8 U2.9 U2.10 U2.11 U2.12 U3.7 U10.1 Unot1.7 Vcc.2 | length 1102.6
  Top Layer w1: CD1_FR.2@85.594,28.787 85.594,27.916 89.64,23.87 96.44,23.87 97.34,22.97 97.34,15.94 102.15,11.13 162.57,11.13 165.32,13.88 C3_FAA.1@165.32,18.207 ; v1(87.59,70.87) 87.59,71.12 87.28,71.43 87.28,78.07 88.63,79.42 92.37,79.42 93.823,80.874 C5_FR.1@98.864,80.874 ; v1(90.36,46.73) 94.63,46.73 95.014,46.347 97.044,48.377 97.044,55.127 100.214,58.297 v1(100.214,63.907) ; Ccoup2-2.2@92.63,171.306 98.584,171.306 102.75,167.14 115.71,167.14 117.6,169.03 v1(117.6,176.464) 117.6,183.044 120.89,186.334 120.89,195.154 122.02,196.284 124.51,196.284 128.347,192.447 Ccoup3-4.2@128.347,191.457 ; Ccoup6-5.2@142.82,165.154 151.87,165.154 v1(151.95,165.234) ; C1_FAA.1@167.47,43.837 167.47,52.95 196.7,82.18 v1(196.7,84.13)
  Bottom Layer w1: TT3_FR.3@64.752,58.47 64.752,57.265 63.694,56.207 61.623,56.207 59.672,58.158 TT3_FR.5@59.672,58.47 59.672,60.015 60.351,60.694 60.284,60.761 60.284,61.6 60.464,61.78 60.464,62.432 60.57,62.539 60.57,64.9 59.254,66.217 52.754,66.217 50.004,63.467 50.004,42.647 52.754,39.897 57.574,39.897 60.114,42.437 60.114,50.408 TT3_FR.10@59.672,50.85 59.672,51.875 60.974,53.177 63.774,53.177 64.752,52.199 TT3_FR.12@64.752,50.85 64.752,46.859 67.164,44.447 C1_FR.1@80.414,44.447 ; C3_FR.1@81.204,35.027 C3_FR.1@81.184,35.047 ; CD1_FR.2@85.594,28.787 85.717,28.787 87.173,30.243 R8_FR.1@87.173,31.88 87.173,32.727 85.661,34.239 R5_FR.1@85.661,35.047 C3_FR.1@81.184,35.047 ; v1(87.59,70.87) 87.59,71.12 87.77,71.3 98.09,71.3 98.812,70.578 98.755,69.193 98.705,67.967 100.107,66.565 ; Ccoup1-3.2@89.084,154.79 96.164,154.79 98.514,157.14 U2.12@98.514,159.91 U2.11@101.054,159.91 U2.10@103.594,159.91 U2.9@106.134,159.91 ; v1(90.36,46.73) 84.847,46.73 82.564,44.447 C1_FR.1@80.414,44.447 ; Ccoup2-2.2@92.63,171.306 90.68,173.256 90.68,178.826 91.76,179.906 U3.7@93.65,179.906 95.47,179.906 96.68,181.116 Ch.2@98.88,181.116 98.92,181.156 98.92,184.536 96.78,186.676 Ccoup1-2.2@92.73,186.676 92.73,189.826 R2-2.1@92.69,189.866 ; J1-3.1@98.344,145.02 98.344,152.12 U2.3@98.514,152.29 U2.4@101.054,152.29 U2.5@103.594,152.29 U2.6@106.134,152.29 U2.9@106.134,159.91 ; v1(100.214,63.907) 100.214,66.296 104.83,61.68 113.52,61.68 119.544,67.704 119.544,73.454 118.914,74.084 R12_FR.1@116.615,74.084 ; Ccoup3-4.2@128.347,191.457 128.347,193.235 131.139,196.027 148.689,196.027 Rcomp1.2@151.715,193.001 ; Ccoup4-4.2@136.03,181.424 132.94,181.424 130.62,179.104 130.62,178.964 129.397,177.741 Ccoup2-4.2@128.728,177.741 126.731,175.744 Jhigh2.1@124.43,175.744 123.66,176.514 Jhigh1.3@120.43,176.514 120.38,176.464 v1(117.6,176.464) 117.51,176.374 117.51,170.87 115.7,169.06 110.37,169.06 108.3,171.13 Unot1.7@106.17,171.13 113.744,163.556 Ccoup2-3.2@113.744,158.85 112.034,158.85 110.974,159.91 U2.8@108.674,159.91 U2.9@106.134,159.91 ; Ccoup6-5.2@142.82,165.154 142.82,162.214 Ccoup5-5.2@143,162.034 143.3,161.734 Jlow2.3@143.3,158.864 143.3,155.934 Jlow1.3@143.45,155.784 ; Rcomp1.2@151.715,192.854 Rcomp1.2@151.715,193.001 ; v1(151.95,165.234) 152.764,164.42 176.586,164.42 ; v1@152,165.824 Rcomp2.2@152,168.924 ; TT2_FAA.10@164.134,80.54 TT2_FAA.10@164.134,80.854 ; C3_FAA.1@165.32,18.207 163.72,19.807 160.86,19.807 158.523,17.47 R5_FAA.1@157.06,17.47 156.984,17.394 R8_FAA.1@153.71,17.394 153.086,18.018 150.039,18.018 148.17,19.887 148.17,27.347 138.6,36.917 138.6,42.757 143.974,48.131 TT3_FAA.12@143.974,49.376 143.334,50.016 143.334,50.163 142.221,51.276 140.647,51.276 139.534,50.163 139.534,50.016 TT3_FAA.10@138.894,49.376 TT3_FAA.5@138.894,56.996 138.894,57.727 138.78,57.84 138.224,57.84 137.17,58.894 137.17,59.451 135.39,61.23 135.39,61.92 136.18,62.71 138.74,62.71 140.234,61.216 140.234,60.94 141.347,59.827 141.623,59.827 143.974,57.476 TT3_FAA.3@143.974,56.996 143.974,56.823 147.101,53.696 151.006,53.696 151.256,53.946 156.979,53.946 ; R12_FAA.1@167.037,83.757 TT2_FAA.10@164.134,80.854 ; Ccoup5.2@167.07,140.83 170.08,140.83 Ccoup4.2@170.21,140.96 174.16,140.96 Ccoup2.2@174.4,140.72 177.97,140.72 Ccoup1.2@178.03,140.78 181.2,140.78 Ccoup3.2@181.33,140.91 181.74,141.32 CD3_FAA.2@185.14,141.32 185.22,141.4 CD2_FAA.2@188.12,141.4 188.202,141.482 CD3_FR.2@191.562,141.482 191.594,141.514 CD2_FR.2@195.83,141.514 ; C1_FAA.1@167.47,43.837 167.088,43.837 156.979,53.946 ; Cf.2@173.178,190.314 Cf.2@173.178,190.542 ; U10.1@174.194,179.011 172.67,177.487 Ccoup1-4.2@172.67,175.709 170.892,173.931 Rd.1@170.892,172.788 170.765,172.915 167.642,172.915 159.97,180.587 159.97,189.425 163.145,192.6 Ccv.2@164.288,192.6 ; CD6_FR.2@174.51,130.774 174.55,130.734 CD5_FR.2@178.5,130.734 CD4_FR.2@182.69,130.734 182.704,130.72 CD6_FAA.2@186.064,130.72 186.104,130.68 CD5_FAA.2@188.81,130.68 188.96,130.53 CD4_FAA.2@191.87,130.53 194.81,130.53 Ccoup6.2@194.87,130.47 ; v1(196.7,84.13) 196.7,107.95 193.72,110.93 Output.1@193.72,111.53 193.62,111.63 193.62,113.6 196.39,116.37 196.39,121.38 Input.1@193.62,124.15 194.87,125.4 Ccoup6.2@194.87,130.47 ; C1_FR.1@80.414,44.447 80.414,35.817 C3_FR.1@81.184,35.047 ; Rcomp1.2@151.715,193.001 151.715,194.251 152.985,195.521 161.367,195.521 Ccv.2@164.288,192.6 ; 156.979,53.946 153.44,57.484 153.44,60.08 149.64,63.88 CD1_FAA.2@149.64,77.437 153.02,80.817 C5_FAA.1@153.84,80.817 155.55,82.527 163.863,82.527 164.134,82.256 TT2_FAA.10@164.134,80.854 ; Ccv.2@164.288,192.6 166.323,194.635 169.948,194.635 173.178,191.405 Cf.2@173.178,190.542 ; Cf.2@173.178,190.542 176.636,194 188.744,194 188.78,193.964 190.38,193.964 192.96,191.384 192.96,173.664 190.46,171.164 183.33,171.164 176.586,164.42 ; 176.586,164.42 180.08,164.42 181.39,165.73 188.65,165.73 189.95,164.43 189.95,159.21 Vcc.2@187.35,156.61 194.58,149.38 196.02,149.38 198.32,147.08 198.32,144.004 CD2_FR.2@195.83,141.514 ; Ccoup6.2@194.87,130.47 197.46,133.06 197.46,139.884 CD2_FR.2@195.83,141.514
high1: Jhigh1.2 Rup1.2 U12.8 | length 17
  Bottom Layer w1: Jhigh1.2@120.43,179.054 127.354,179.054 127.941,179.641 128.947,179.641 132.43,183.124 Rup1.2@132.43,183.374 133.091,183.374 U12.8@134.824,185.107
high2: Jhigh2.2 Rup2.2 U13.8 | length 12.3
  Bottom Layer w1: Jhigh2.2@124.43,173.204 127.85,173.204 131.26,169.794 Rup2.2@132.02,169.794 134.95,169.794 U13.8@135.21,170.054
Input: Input.2 J0-1.2 | length 33.2
  Bottom Layer w1: J0-1.2@167,108.48 170.33,108.48 173.11,111.26 173.11,114.87 176.16,117.92 192.39,117.92 Input.2@193.62,119.15
Input1: J2-1.3 U3.3 | length 22.2
  Bottom Layer w1: J2-1.3@74.81,160.96 74.81,164.496 82.85,172.536 82.85,176.226 83.99,177.366 U3.3@86.03,177.366
Input2: J4-1.3 U2.1 | length 24.7
  Bottom Layer w1: J4-1.3@74.67,137.96 75.55,137.96 89.88,152.29 U2.1@93.434,152.29
low1: Jlow1.2 U12.1 U12.4 | length 53.1
  Bottom Layer w1: Jlow1.2@140.91,155.784 140.91,154.114 139.99,153.194 136.11,153.194 133.85,155.454 133.85,165.774 138.13,170.054 138.13,179.004 139.2,180.074 139.2,182.294 142.013,185.107 U12.1@142.297,185.107 ; U12.1@142.444,185.107 U12.1@142.297,185.107 ; U12.4@142.444,192.727 141.783,192.727 140.5,191.444 140.5,186.904 U12.1@142.297,185.107
low2: Jlow2.2 U13.1 U13.4 | length 21.9
  Bottom Layer w1: Jlow2.2@140.76,158.864 140.76,167.984 U13.1@142.83,170.054 142.44,170.054 140.93,171.564 140.93,175.921 142.043,177.034 142.83,177.034 U13.4@142.83,177.674
NetC1_FAA_2: C1_FAA.2 R2.b_FAA.2 TT1_FAA.3 | length 17.2
  Bottom Layer w1: C1_FAA.2@172.55,43.837 170.92,42.207 170.92,39.196 171.41,38.706 171.41,37.597 174.844,34.164 TT1_FAA.3@174.844,33.916 175.433,34.505 R2.b_FAA.2@175.433,38.607
NetC1_FR_2: C1_FR.2 R2.b_FR.2 TT1_FR.3 | length 54.1
  Bottom Layer w1: C1_FR.2@85.494,44.447 92.944,44.447 94.634,42.756 94.634,42.496 94.847,42.284 R2.b_FR.2@94.847,40.437 96.424,40.437 96.71,40.15 101.48,40.15 103,38.63 103.59,38.63 104.85,37.37 104.85,33.38 104.077,32.607 92.317,32.607 87.954,28.244 TT1_FR.3@87.954,20.677
NetC2_FAA_1: C2_FAA.1 R2_FAA.1 R3_FAA.2 | length 13.1
  Bottom Layer w1: R2_FAA.1@175.333,41.057 176.623,41.057 178.343,42.777 C2_FAA.1@180.894,42.777 180.894,40.967 183.834,38.027 R3_FAA.2@183.834,37.21
NetC2_FR_1: C2_FR.1 R2_FR.1 R3_FR.2 | length 6.8
  Bottom Layer w1: R2_FR.1@94.847,37.787 94.847,35.04 R3_FR.2@94.86,35.027 98.824,35.027 C2_FR.1@98.894,35.097
NetC3_FAA_2: C3_FAA.2 R1_FAA.2 TT1_FAA.10 | length 7.8
  Bottom Layer w1: C3_FAA.2@165.32,23.287 R1_FAA.2@169.801,23.287 ; TT1_FAA.10@169.764,26.296 169.764,23.324 R1_FAA.2@169.801,23.287 ; R1_FAA.2@170.011,23.077 R1_FAA.2@169.801,23.287
NetC3_FR_2: C3_FR.2 R1_FR.2 TT1_FR.10 | length 27.5
  Bottom Layer w1: R1_FR.2@79.004,24.034 80.561,24.034 81.204,24.677 ; C3_FR.2@81.204,29.947 81.204,24.677 ; TT1_FR.10@82.874,13.057 82.874,15.097 81.554,16.417 79.293,16.417 75.834,19.876 75.834,21.347 76.964,22.477 78.539,22.477 78.626,22.39 79.501,22.39 79.588,22.477 79.627,22.477 81.204,24.053 81.204,24.677
NetC4_FAA_1: C4_FAA.1 R1.b_FAA.1 R6_FAA.2 | length 12.5
  Bottom Layer w1: C4_FAA.1@161.86,17.607 C4_FAA.1@161.86,17.307 163.53,15.637 166.08,15.637 168.97,18.527 R6_FAA.2@170.011,18.527 169.941,18.597 R1.b_FAA.1@169.941,20.687
NetC4_FR_1: C4_FR.1 R1.b_FR.1 R6_FR.2 | length 7.9
  Bottom Layer w1: C4_FR.1@72.524,19.537 72.484,19.577 R6_FR.2@72.484,24.254 R1.b_FR.1@75.674,24.254
NetC5_FAA_2: C5_FAA.2 R9_FAA.2 TT2_FAA.3 | length 27.9
  Bottom Layer w1: C5_FAA.2@148.76,80.817 151.19,83.247 154.29,83.247 155.56,84.517 165.347,84.517 165.375,84.545 165.375,84.841 165.902,85.368 166.198,85.368 166.537,85.707 167.39,85.707 169.214,87.531 TT2_FAA.3@169.214,88.16 169.214,88.754 170.211,89.751 R9_FAA.2@170.211,91.597
NetC5_FR_2: C5_FR.2 R9_FR.2 TT2_FR.3 | length 13.8
  Bottom Layer w1: TT2_FR.3@103.892,76.811 103.944,76.863 C5_FR.2@103.944,80.874 103.944,83.804 103.374,84.374 103.374,87.794 104.347,88.767 R9_FR.2@105.534,88.767
NetC6_FAA_1: C6_FAA.1 R9.b_FAA.1 R10_FAA.2 | length 17.8
  Bottom Layer w1: R9.b_FAA.1@170.261,94.277 168.08,94.277 167.35,95.007 167.35,96.327 168.74,97.717 173.62,97.717 175.084,96.253 C6_FAA.1@175.084,95.977 178.964,95.977 R10_FAA.2@179.094,96.107
NetC6_FR_1: C6_FR.1 R9.b_FR.1 R10_FR.2 | length 28.9
  Bottom Layer w1: R9.b_FR.1@108.614,88.697 R10_FR.2@111.604,88.697 111.604,90.874 114.07,93.34 116.62,93.34 120.49,89.47 120.49,85.98 114.814,80.304 C6_FR.1@114.104,80.304
NetC8_FAA_1: C8_FAA.1 R14_FAA.2 R23_FAA.1 TT2_FAA.9 | length 6.7
  Bottom Layer w1: R14_FAA.2@161.543,73.85 161.594,73.901 TT2_FAA.9@161.594,80.54
NetC8_FR_1: C8_FR.1 R14_FR.2 R23_FR.1 TT2_FR.9 | length 12.5
  Bottom Layer w1: R14_FR.2@96.034,57.984 96.137,58.087 R23_FR.1@96.137,60.954 96.137,63.207 C8_FR.1@97.674,64.744 97.674,65.598 96.272,67 TT2_FR.9@96.272,69.191
NetC9_FAA_1: C9_FAA.1 R17.b_FAA.2 R17_FAA.2 R18.b_FAA.1 R18_FAA.1 R22.b_FAA.1 R22_FAA.1 TT3_FAA.2 | length 82.3
  Bottom Layer w1: R17.b_FAA.2@135.457,38.217 135.447,38.227 R17_FAA.2@135.447,40.707 ; R22_FAA.1@135.727,44.567 135.727,40.987 R17_FAA.2@135.447,40.707 ; TT3_FAA.2@146.495,56.996 TT3_FAA.2@146.514,56.996 146.514,56.763 147.154,56.123 147.154,55.623 147.681,55.096 150.426,55.096 150.954,55.623 150.954,56.037 151.614,56.697 151.614,58.803 148.69,61.727 C9_FAA.1@147.214,61.727 147.214,63.656 141.29,69.58 131.63,69.58 126.98,64.93 126.98,63.46 123.784,60.264 123.784,53.477 125.387,51.874 R18_FAA.1@126.274,51.874 128.584,51.874 R18.b_FAA.1@128.634,51.924 128.634,46.76 R22.b_FAA.1@128.471,46.597 128.584,46.484 128.584,45.217 131.144,42.657 134.314,42.657 135.447,41.524 R17_FAA.2@135.447,40.707
NetC9_FAA_2: C9_FAA.2 R18.b_FAA.2 R18_FAA.2 R20.b_FAA.1 R20_FAA.1 TT3_FAA.1 | length 40.6
  Bottom Layer w1: R18_FAA.2@126.274,54.16 128.584,54.16 R18.b_FAA.2@128.634,54.21 128.634,64.564 130.32,66.25 131.11,66.25 132.453,67.593 R20_FAA.1@134.23,67.593 134.29,67.533 R20.b_FAA.1@136.94,67.533 139.217,67.533 141.29,65.46 141.29,62.57 C9_FAA.2@142.134,61.727 144.47,61.727 149.054,57.143 TT3_FAA.1@149.054,56.996
NetC9_FR_1: C9_FR.1 R17.b_FR.2 R17_FR.2 R18.b_FR.1 R18_FR.1 R22.b_FR.1 R22_FR.1 TT3_FR.2 | length 33.7
  Bottom Layer w1: TT3_FR.2@67.292,58.47 67.227,58.535 R17_FR.2@67.227,62.747 R17.b_FR.2@67.227,66.357 67.174,66.41 C9_FR.1@67.174,70.237 66.644,69.707 63.204,69.707 61.694,71.217 61.694,75.637 62.494,76.437 R22_FR.1@64.364,76.437 67.011,76.437 R22.b_FR.1@67.064,76.49 69.767,76.49 R18_FR.1@69.814,76.537 69.861,76.49 R18.b_FR.1@72.444,76.49
NetC9_FR_2: C9_FR.2 R18.b_FR.2 R18_FR.2 R20.b_FR.1 R20_FR.1 TT3_FR.1 | length 49.9
  Bottom Layer w1: R18_FR.2@69.814,74.251 69.861,74.204 R18.b_FR.2@72.444,74.204 72.444,70.427 C9_FR.2@72.254,70.237 81.133,70.237 85.32,66.05 85.32,62.89 80.9,58.47 73.881,58.47 ; TT3_FR.1@69.832,58.47 73.881,58.47 ; R20_FR.1@79.554,55.837 79.484,55.907 R20.b_FR.1@77.114,55.907 74.45,55.907 74.444,55.913 74.444,57.907 73.881,58.47
NetC10_FAA_1: C10_FAA.1 R20.b_FAA.2 R20_FAA.2 TT3_FAA.6 | length 15.3
  Bottom Layer w1: TT3_FAA.6@136.354,56.996 136.354,57.731 135.77,58.314 135.77,58.871 C10_FAA.1@131.124,63.517 132.914,65.307 R20_FAA.2@134.23,65.307 134.29,65.247 R20.b_FAA.2@136.94,65.247
NetC10_FAA_2: C10_FAA.2 R19_FAA.1 TT3_FAA.7 | length 7.3
  Bottom Layer w1: C10_FAA.2@131.124,58.437 132.565,56.996 TT3_FAA.7@133.814,56.996 133.501,56.683 R19_FAA.1@133.501,53.137
NetC10_FR_1: C10_FR.1 R20.b_FR.2 R20_FR.2 TT3_FR.6 | length 30.5
  Bottom Layer w1: C10_FR.1@58.564,62.567 58.564,61.247 57.132,59.815 TT3_FR.6@57.132,58.47 57.132,56.099 58.584,54.647 64.912,54.647 64.962,54.597 71.762,54.597 72.738,53.621 R20.b_FR.2@77.114,53.621 79.484,53.621 R20_FR.2@79.554,53.551
NetC10_FR_2: C10_FR.2 R19_FR.1 TT3_FR.7 | length 22.8
  Bottom Layer w1: C10_FR.2@53.484,62.567 53.484,61.047 54.592,59.939 TT3_FR.7@54.592,58.47 54.592,54.025 52.424,51.857 52.424,44.057 53.844,42.637 R19_FR.1@54.741,42.637
NetCcv_1: Ccv.1 U10.5 | length 2.7
  Bottom Layer w1: Ccv.1@164.288,187.52 165.685,187.52 U10.5@166.574,186.631